# EAGLE board Rover-7_Power_Supply (EAGLE 7.7.0)
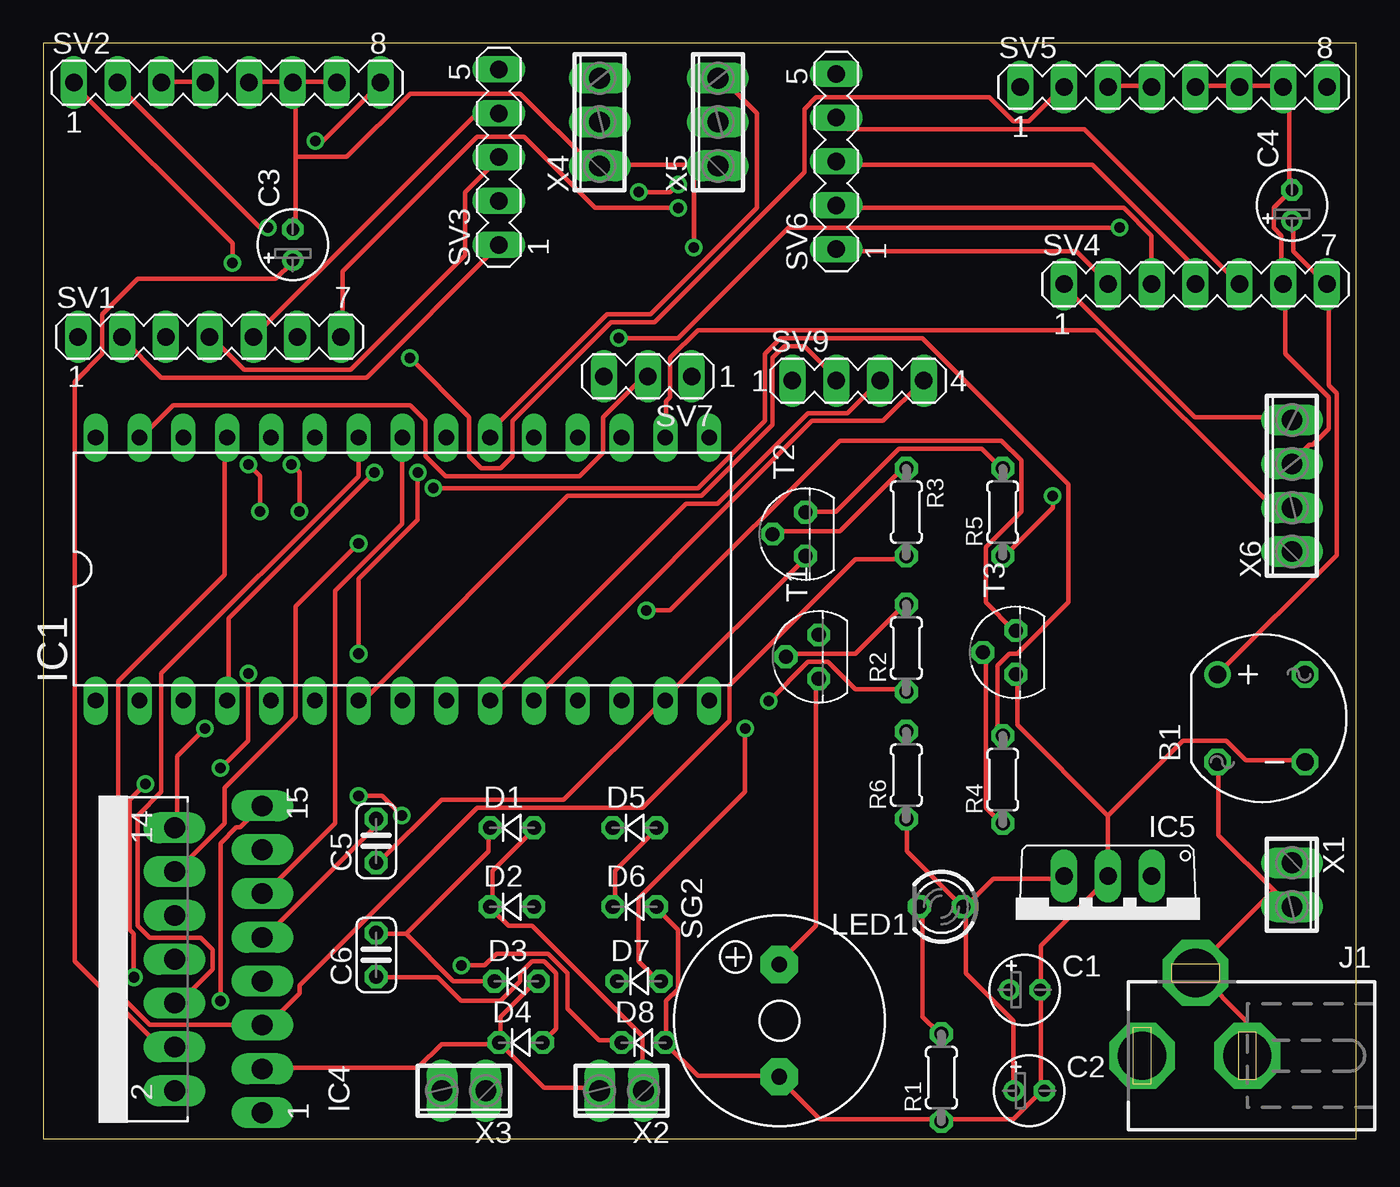
[diagram p0: board, top side]
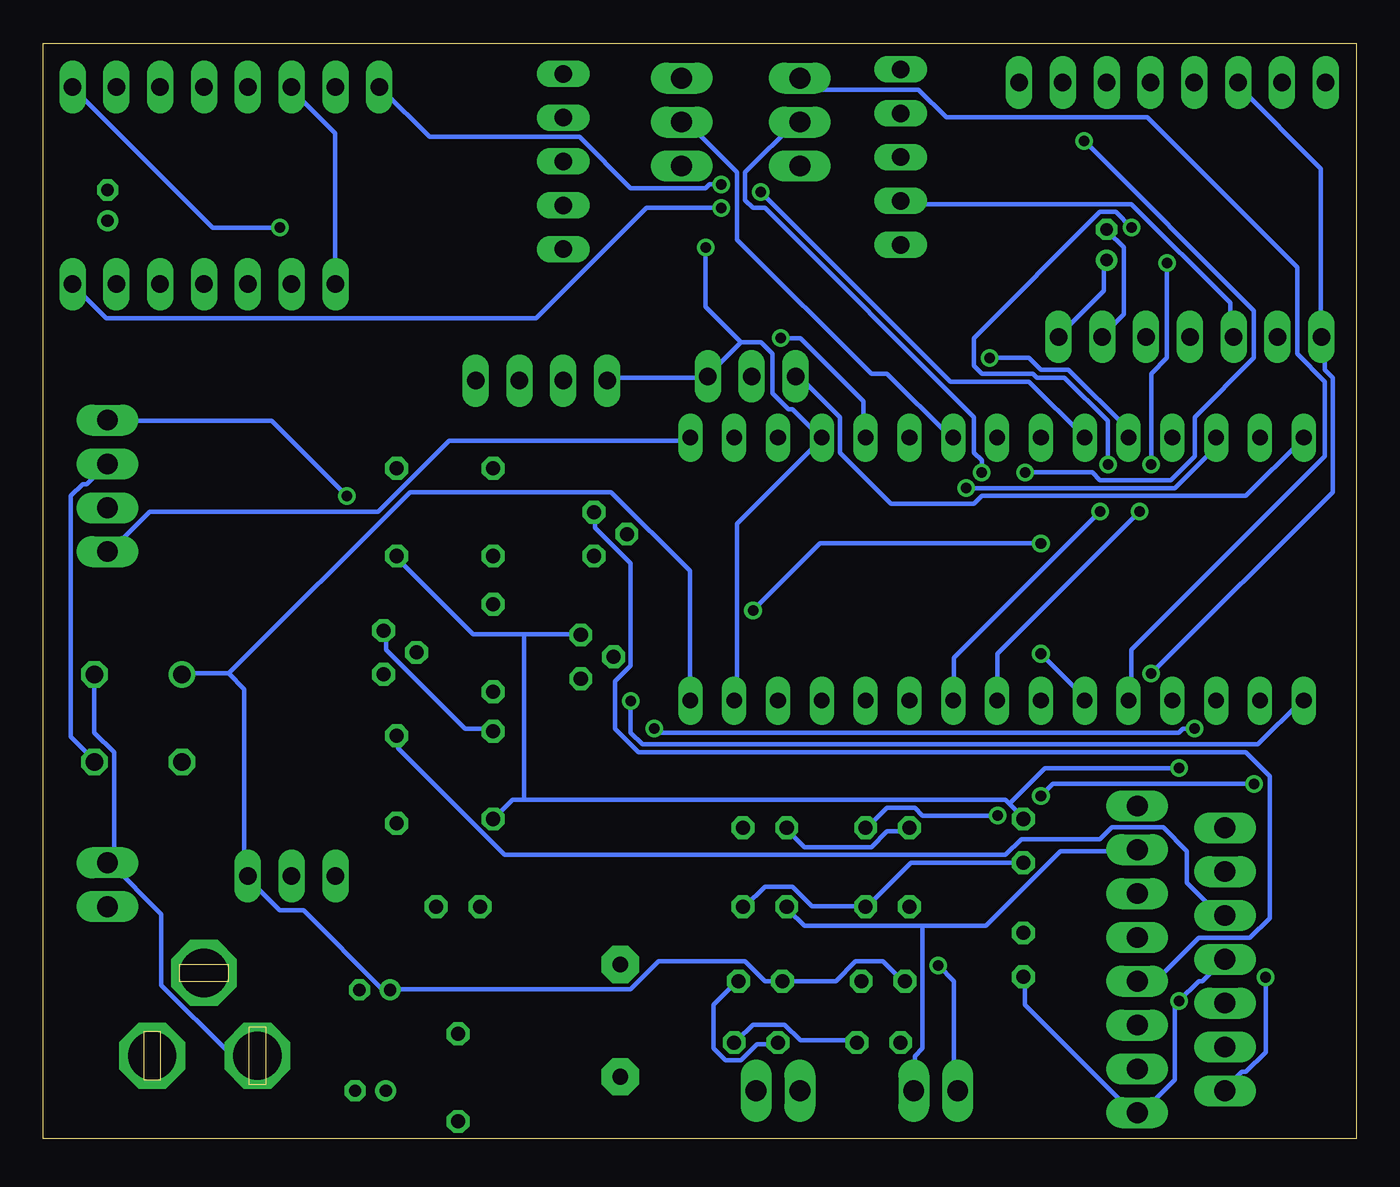
[diagram p1: board, bottom side, seen from below]

Size 76.12 x 63.49 mm. Coordinates in mm from the lower left corner, seen from the top.
Outline: 0,0 76.12,0 76.12,63.49 0,63.49 0,0
Copper layers (1*16): Top 0.035mm / dielectric 1.5mm / Bottom 0.035mm
Design rules "default": minimum track width 10mil, minimum drill 24mil, track to track 8mil, track to pad 8mil, pad to pad 8mil, via to via 8mil, smd to smd 8mil, copper to edge 40mil, drill to drill 8mil, minimum pad ring 10mil, minimum via ring 8mil, stop-mask expansion 4mil, vias tented up to drill 0mil, thermal gap 10mil

## Footprints (pad centres in the part's own frame; a part is rotated, then mirrored left to right if it is on the bottom)
RB1A = drill 1.016: + -2.54,2.54 | drill 1.016 octagon: - 2.54,-2.54; AC1 2.54,2.54; AC2 -2.54,-2.54
E1,8-4 = drill 0.711 pad 1.168: + -0.889,0 | drill 0.711 pad 1.168 octagon: - 0.889,0
C025-024X044 = drill 0.813 octagon: 1 -1.27,0; 2 1.27,0
D-2.5 = drill 0.813 octagon: A 1.27,0; C -1.27,0
DIL32 = drill 0.9 long: 1 -19.05,-7.62; 2 -16.51,-7.62; 3 -13.97,-7.62; 4 -11.43,-7.62; 5 -8.89,-7.62; 6 -6.35,-7.62; 7 -3.81,-7.62; 8 -1.27,-7.62; 9 1.27,-7.62; 10 3.81,-7.62; 11 6.35,-7.62; 12 8.89,-7.62; 13 11.43,-7.62; 14 13.97,-7.62; 15 16.51,-7.62; 18 16.51,7.62; 19 13.97,7.62; 20 11.43,7.62; 21 8.89,7.62; 22 6.35,7.62; 23 3.81,7.62; 24 1.27,7.62; 25 -1.27,7.62; 26 -3.81,7.62; 27 -6.35,7.62; 28 -8.89,7.62; 29 -11.43,7.62; 30 -13.97,7.62; 31 -16.51,7.62; 32 -19.05,7.62
MULTIWATT-15 = drill 1.2 long: 1 -8.89,-7.62; 2 -7.62,-2.54; 3 -6.35,-7.62; 4 -5.08,-2.54; 5 -3.81,-7.62; 6 -2.54,-2.54; 7 -1.27,-7.62; 8 0,-2.54; 9 1.27,-7.62; 10 2.54,-2.54; 11 3.81,-7.62; 12 5.08,-2.54; 13 6.35,-7.62; 14 7.62,-2.54; 15 8.89,-7.62
TO220V = drill 1.016 long: 1 -2.54,-2.54; 2 0,-2.54; 3 2.54,-2.54
ROVER-PW-JACL = drill 2.8 pad 3.81 octagon: 1 0,3.1; 2 4.8,0; 3 0,-3
LED3MM = drill 0.813 octagon: A -1.27,0; K 1.27,0
0204/5 = drill 0.813 octagon: 1 -2.54,0; 2 2.54,0
F/QMX = drill 0.914 pad 2.159 octagon: + 3.251,0; - -3.251,0
MA07-1 = drill 1.016 long: 1 -7.62,0; 2 -5.08,0; 3 -2.54,0; 4 0,0; 5 2.54,0; 6 5.08,0; 7 7.62,0
MA08-1 = drill 1.016 long: 1 -8.89,0; 2 -6.35,0; 3 -3.81,0; 4 -1.27,0; 5 1.27,0; 6 3.81,0; 7 6.35,0; 8 8.89,0
MA05-1 = drill 1.016 long: 1 -5.08,0; 2 -2.54,0; 3 0,0; 4 2.54,0; 5 5.08,0
MA03-1 = drill 1.016 long: 1 -2.54,0; 2 0,0; 3 2.54,0
MA04-1 = drill 1.016 long: 1 -3.81,0; 2 -1.27,0; 3 1.27,0; 4 3.81,0
TO92 = drill 0.813 octagon: 1 1.27,0; 2 0,1.905; 3 -1.27,0
2POL254 = drill 1.2 long: 1 -1.27,0; 2 1.27,0
3POL254 = drill 1.2 long: 1 -2.54,0; 2 0,0; 3 2.54,0
4POL254 = drill 1.2 long: 1 -3.81,0; 2 -1.27,0; 3 1.27,0; 4 3.81,0

## Placement (x,y rotation side)
B1  RECTIFIER  [RB1A]  70.61,24.38 0 top
C1  100uF  [E1,8-4]  56.9,8.64 0 top
C2  100uF  [E1,8-4]  57.15,2.79 0 top
C3  100uF  [E1,8-4]  14.48,51.82 90 top
C4  100uF  [E1,8-4]  72.39,54.1 90 top
C5  0.1uF  [C025-024X044]  19.3,17.27 90 top
C6  0.1uF  [C025-024X044]  19.3,10.67 90 top
D1  [D-2.5]  27.18,18.03 0 top
D2  [D-2.5]  27.18,13.46 0 top
D3  [D-2.5]  27.43,9.14 0 top
D4  [D-2.5]  27.69,5.59 0 top
D5  [D-2.5]  34.29,18.03 0 top
D6  [D-2.5]  34.29,13.46 0 top
D7  [D-2.5]  34.54,9.14 0 top
D8  [D-2.5]  34.8,5.59 0 top
IC1  Nano Module  [DIL32]  22.1,33.02 0 top
IC4  L298_DC_Motor_Driver  [MULTIWATT-15]  5.08,10.41 90 top
IC5  7805TV  [TO220V]  61.72,12.7 180 top
J1  Power Jack  [ROVER-PW-JACL]  66.8,4.83 90 top
LED1  [LED3MM]  52.07,13.46 180 top
R1  680  [0204/5]  52.07,3.56 90 top
R2  1K  [0204/5]  50.04,28.45 90 top
R3  1K  [0204/5]  50.04,36.32 270 top
R4  1K  [0204/5]  55.63,20.83 90 top
R5  10K  [0204/5]  55.63,36.32 90 top
R6  10K  [0204/5]  50.04,21.08 90 top
SG2  Buzzer  [F/QMX]  42.67,6.86 90 top
SV1  STEP1_DR_MOD_2  [MA07-1]  9.65,46.48 0 top
SV2  STEP1_DR_MOD_1  [MA08-1]  10.67,61.21 0 top
SV3  STEP1_CON  [MA05-1]  26.42,56.9 90 top
SV4  STEP2_DR_MOD_2  [MA07-1]  66.8,49.53 0 top
SV5  STEP2_DR_MOD_1  [MA08-1]  65.53,60.96 0 top
SV6  STEP2_CON  [MA05-1]  45.97,56.64 90 top
SV7  SPI_CON  [MA03-1]  35.05,44.2 180 top
SV9  SPARE_IO  [MA04-1]  47.24,43.94 0 top
T1  2N3904  [TO92]  44.96,27.94 90 top
T2  2N3904  [TO92]  44.2,35.05 90 top
T3  2N3904  [TO92]  56.39,28.19 90 top
X1  Power Con  [2POL254]  72.39,14.73 270 top
X2  [2POL254]  33.53,2.79 180 top
X3  [2POL254]  24.38,2.79 180 top
X4  STEP1_SENS_CON  [3POL254]  32.26,58.93 90 top
X5  STEP2_SENS_CON  [3POL254]  39.12,58.93 90 top
X6  Bluetooth Con  [4POL254]  72.39,37.85 90 top

## Library data of the parts
B1 = rectifier
C1-C4 R1-R6 = rcl
C5 C6 = resistor
D1-D8 = diode
IC1 = Nano-II_DIP_30P
IC4 = st-microelectronics; MPN: L298N; OC_FARNELL: 1589425; OC_NEWARK: 32M1527
IC5 = linear
J1 = Rover-PW-Jack; OC_FARNELL: unknown; OC_NEWARK: unknown
LED1 = led
SG2 = buzzer; OC_FARNELL: unknown; OC_NEWARK: unknown
SV1-SV7 SV9 = con-lstb; OC_FARNELL: unknown; OC_NEWARK: unknown
T1-T3 = transistor
X1-X6 = con-phoenix-254; OC_FARNELL: unknown; OC_NEWARK: unknown

## Nets
+5V: C2.+ C5.2 IC4.9 IC5.3 LED1.A R5.1 R6.1 SV1.1 SV2.3 SV2.4 SV4.1 SV5.3 SV5.4 T1.1 X6.4
+12V: B1.+ C1.+ C3.+ C4.+ C6.2 D1.C D3.C D5.C D7.C IC1.15 IC4.4 IC5.1 SV1.7 SV4.7
A3: IC1.7 SV9.2
A6: IC1.10 SV9.3
A7: IC1.11 SV9.4
BUZ_D13: IC1.1 R2.1
M1_A: D1.A D2.C IC4.2 X2.1
M1_B: D3.A D4.C IC4.3 X2.2
M1_DIR_D9: IC1.29 IC4.5 R3.2
M1_DIR_D9_INV: IC4.7 R5.2 T2.1
M1_PWM_D6: IC1.26 IC4.6
M2_A: D5.A D6.C IC4.13 X3.1
M2_B: D7.A D8.C IC4.14 X3.2
M2_DIR_D10: IC1.30 IC4.10 R4.2
M2_DIR_D10_INV: IC4.12 R6.2 T3.1
M2_PWM_D5: IC1.25 IC4.11
MISO_D12: IC1.32 SV7.3
MOSI_D11: IC1.31 SV7.2
N$2: B1.AC1 J1.1 X1.1
N$3: B1.AC2 J1.2 J1.3 X1.2
N$4: LED1.K R1.2
N$5: R4.1 T3.2
N$6: R3.1 T2.2
N$8: SG2.+ T1.3
N$9: R2.2 T1.2
PE: B1.- C1.- C2.- C3.- C4.- C5.1 C6.1 D2.A D4.A D6.A D8.A IC1.14 IC1.21 IC4.1 IC4.8 IC4.15 IC5.2 R1.1 SG2.- SV1.6 SV2.5 SV2.6 SV2.7 SV4.6 SV5.5 SV5.6 SV5.7 SV7.1 SV9.1 T2.3 T3.3 X4.1 X5.1 X6.3
RX_D1: IC1.19 X6.2
STEP1_1A: SV1.3 SV3.2
STEP1_1B: SV1.2 SV3.1
STEP1_2A: SV1.4 SV3.3
STEP1_2B: SV1.5 SV3.4
STEP1_DIR_A4: IC1.8 SV2.1
STEP1_EN_A0: IC1.4 SV2.8
STEP1_L_SW_A1: IC1.5 X4.3
STEP1_R_SW_A2: IC1.6 X4.2
STEP1_STEP_A5: IC1.9 SV2.2
STEP2_1A: SV4.3 SV6.2
STEP2_1B: SV4.2 SV6.1
STEP2_2A: SV4.4 SV6.3
STEP2_2B: SV4.5 SV6.4
STEP2_DIR_D7: IC1.27 SV5.1
STEP2_EN_D2: IC1.22 SV5.8
STEP2_L_SW_D4: IC1.24 X5.2
STEP2_R_SW_D3: IC1.23 X5.3
STEP2_STEP_D8: IC1.28 SV5.2
TX_D0: IC1.18 X6.1

## Tracks (layer width: path | path; a pad name or v marks a point on that pad's centre or on a via)
+5V  (via drill 0.61)
  Top 0.254: SV5.4 64.24,61.04 61.72,61.04 SV5.3 | X6.4 72.24,41.83 66.75,41.83 59.21,49.38 SV4.1 | SV2.4 9.37,61.27 6.86,61.27 SV2.3 | C5.2 19.2,18.52 19.2,18.06 12.8,11.66 IC4.9 | C2.+ 56.24,2.97 56.24,6.86 53.49,9.6 53.49,13.26 LED1.A | R6.1 50.06,18.52 50.06,16.69 53.26,13.49 LED1.A | IC5.3 58.98,15.09 55.09,15.09 53.49,13.49 LED1.A | v11.89,26.98 11.89,23.09 v10.29,21.49 | v58.52,37.26 58.52,36.58 55.78,33.83 R5.1
  Bottom 0.254: SV4.1 59.21,49.61 59.21,58.29 61.72,60.81 SV5.3 | SV2.3 6.86,61.04 2.06,56.24 2.06,46.63 SV1.1 1.83,46.41 1.83,44.58 1.37,44.12 1.37,37.49 v11.89,26.98 | 48.23,29.26 51.21,29.26 55.55,33.6 R5.1 | 48.23,29.26 45.03,29.26 T1.1 | 20.12,19.43 20.34,19.66 48.23,19.66 | 20.12,19.43 19.43,18.75 C5.2 | 48.23,19.66 48.92,19.66 R6.1 | 48.23,19.66 48.23,29.26 | v10.29,21.49 18.06,21.49 20.12,19.43 | v58.52,37.26 62.87,41.6 72.24,41.6 X6.4
+12V  (via drill 0.61)
  Top 0.254: IC4.4 7.54,5.49 6.63,5.49 1.83,10.29 1.83,43.89 3.43,45.49 3.43,47.78 5.49,49.84 13.49,49.84 14.4,50.75 C3.+ | 21.03,11.89 19.43,11.89 C6.2 | 21.03,11.89 23.77,9.14 D3.C | 21.03,11.89 25.83,16.69 25.83,17.83 D1.C | C4.+ 72.47,53.03 72.47,51.44 74.3,49.61 SV4.7 74.52,49.38 74.52,43.66 74.98,43.2 74.98,33.83 B1.+ | v36.8,53.95 32,53.95 27.89,58.06 25.15,58.06 17.37,50.29 17.37,46.63 SV1.7
  Bottom 0.254: C3.+ 14.63,50.75 14.63,49.15 17.14,46.63 SV1.7 | D1.C 26.06,17.83 27.2,17.83 28.12,16.92 32,16.92 32.92,17.83 D5.C | D3.C 26.29,9.14 27.43,10.29 29.03,10.29 30.18,9.14 D7.C 34.29,9.14 35.43,10.29 40.46,10.29 42.06,8.69 56.01,8.69 | 56.01,8.69 56.46,8.69 61.04,13.26 62.41,13.26 64.24,15.09 IC5.1 64.47,15.32 64.47,26.06 65.38,26.98 | 65.38,26.98 54.86,37.49 43.2,37.49 38.63,32.92 38.63,25.6 IC1.15 | 65.38,26.98 67.89,26.98 B1.+ | 56.01,8.69 C1.+ | v36.8,53.95 41.15,53.95 47.55,47.55 72.47,47.55 74.3,49.38 SV4.7
A3
  Top 0.254: IC1.7 18.29,25.6 18.75,25.6 30.4,37.26 38.18,37.26 42.29,41.38 42.29,45.26 42.98,45.95 44.12,45.95 45.95,44.12 SV9.2
A6
  Top 0.254: SV9.3 46.63,42.06 44.35,42.06 39.09,36.8 37.26,36.8 26.06,25.6 IC1.10
A7
  Top 0.254: IC1.11 28.57,25.6 44.58,41.6 48.69,41.6 50.98,43.89 SV9.4
BUZ_D13  (via drill 0.61)
  Top 0.254: v42.06,25.38 44.35,27.66 45.49,27.66 47.09,26.06 49.84,26.06 R2.1
  Bottom 0.254: v42.06,25.38 42.06,23.55 41.38,22.86 5.71,22.86 3.2,25.38 IC1.1
M1_A  (via drill 0.61)
  Top 0.254: D1.A 28.35,17.83 26.06,15.54 26.06,13.49 D2.C 26.06,13.26 26.98,12.34 28.35,12.34 34.75,5.94 34.75,2.97 X2.1 | v5.26,9.37 5.26,11.89 5.03,12.12 5.03,19.66 v5.94,20.57 | v18.29,19.89 19.66,19.89 v20.8,18.75
  Bottom 0.254: v5.26,9.37 5.26,5.03 6.4,3.89 6.63,3.89 7.54,2.97 IC4.2 | v5.94,20.57 17.6,20.57 v18.29,19.89 | v20.8,18.75 25.15,18.75 25.6,19.2 27.2,19.2 28.35,18.06 D1.A
M1_B
  Top 0.254: D4.C 26.52,5.71 26.52,7.09 28.57,9.14 D3.A | D4.C 29.03,2.97 32.23,2.97 X2.2 | IC4.3 12.8,4.12 21.72,4.12 23.09,5.49 26.29,5.49 D4.C
M1_DIR_D9
  Top 0.254: R3.2 49.84,33.6 47.09,33.6 39.78,26.29 39.78,24.23 34.75,19.2 25.15,19.2 14.86,8.91 14.86,8.46 12.8,6.4 IC4.5 12.57,6.63 6.17,6.63 4.34,8.46 4.34,26.52 10.52,32.69 10.52,40.46 IC1.29
M1_DIR_D9_INV
  Top 0.254: T2.1 44.35,36.35 45.95,36.35 49.61,40.01 54.41,40.01 55.55,38.86 R5.2
  Bottom 0.254: IC4.7 11.66,9.14 9.14,11.66 6.17,11.66 5.03,12.8 5.03,21.03 6.4,22.4 41.6,22.4 42.98,23.77 42.98,26.52 42.06,27.43 42.06,33.38 44.12,35.43 44.12,36.12 T2.1
M1_PWM_D6
  Top 0.254: IC1.26 18.29,38.41 6.86,26.98 6.86,20.12 5.49,18.75 5.49,12.34 6.17,11.66 9.14,11.66 9.83,10.97 9.83,9.83 7.77,7.77 IC4.6
M2_A
  Top 0.254: D6.C 33.15,13.49 33.15,15.54 35.43,17.83 D5.A
  Bottom 0.254: 25.15,12.34 32,12.34 32.92,13.26 D6.C | 25.15,12.34 21.49,12.34 17.14,16.69 12.8,16.69 IC4.13 | 25.15,12.34 25.15,5.26 25.6,4.8 25.6,2.97 X3.1
M2_B  (via drill 0.61)
  Top 0.254: v24.23,10.06 25.6,10.06 26.29,10.74 29.26,10.74 30.4,9.6 30.4,7.54 32.23,5.71 33.38,5.71 D8.C | v9.37,23.77 7.77,22.17 7.77,18.06 IC4.14 | v40.69,23.77 40.69,20.12 34.52,13.95 34.52,10.29 35.66,9.14 D7.A
  Bottom 0.254: D8.C 33.6,5.49 34.75,5.49 35.66,4.57 36.58,4.57 37.26,5.26 37.26,7.77 35.89,9.14 D7.A | v24.23,10.06 23.32,9.14 23.32,2.97 X3.2 | v9.37,23.77 10.06,23.77 10.29,23.55 40.46,23.55 v40.69,23.77
M2_DIR_D10  (via drill 0.61)
  Top 0.254: v22.63,37.72 37.95,37.72 41.83,41.6 41.83,45.49 42.75,46.41 50.98,46.41 59.44,37.95 59.44,31.09 56.46,28.12 56.01,28.12 55.32,27.43 55.32,23.77 55.55,23.55 R4.2
  Bottom 0.254: R4.2 55.55,23.32 55.55,22.63 49.38,16.46 20.34,16.46 19.43,17.37 14.86,17.37 14.17,18.06 11.2,18.06 9.83,16.69 9.83,14.86 7.77,12.8 IC4.10 | v22.63,37.72 10.52,37.72 8.23,40.01 8.23,40.46 IC1.30
M2_DIR_D10_INV  (via drill 0.61)
  Top 0.254: v18.29,34.52 14.63,30.86 14.63,24.46 10.52,20.34 10.52,18.29 7.77,15.54 IC4.12 | v34.98,30.63 36.35,30.63 46.18,40.46 55.55,40.46 56.69,39.32 56.69,36.35 54.63,34.29 54.63,31.09 56.24,29.49 T3.1
  Bottom 0.254: R6.2 50.06,23.77 51.66,23.77 56.24,28.35 56.24,29.26 T3.1 | v18.29,34.52 31.09,34.52 v34.98,30.63
M2_PWM_D5
  Top 0.254: IC1.25 20.8,40.46 20.8,35.66 16.92,31.77 16.92,18.29 12.8,14.17 IC4.11
MISO_D12
  Bottom 0.254: IC1.32 3.2,40.46 6.4,37.26 21.72,37.26 22.17,36.8 26.98,36.8 29.95,39.78 29.95,41.83 32.46,44.35 SV7.3
MOSI_D11
  Top 0.254: IC1.31 5.71,40.69 7.54,42.52 21.26,42.52 22.17,41.6 22.17,39.55 23.32,38.41 31.09,38.41 32.46,39.78 32.46,41.83 34.98,44.35 SV7.2
N$2
  Bottom 0.254: B1.AC1 73.15,23.55 72.01,22.4 72.01,16.23 72.24,16 | 72.24,16 69.27,13.03 69.27,8.91 65.38,5.03 63.78,5.03 J1.1 | 72.24,16 X1.1
N$3
  Top 0.254: 71.32,14.4 72.24,13.49 X1.2 | 71.32,14.4 68.12,17.6 68.12,21.72 B1.AC2 | 71.32,14.4 66.75,9.83 J1.2 66.98,9.6 69.72,6.86 69.72,5.03 J1.3
N$4
  Top 0.254: LED1.K 50.98,13.26 50.98,7.09 51.89,6.17 R1.2
N$5
  Top 0.254: T3.2 54.63,28.12 54.63,19.2 55.55,18.29 R4.1
N$6
  Top 0.254: T2.2 42.29,35.2 46.18,35.2 49.84,38.86 R3.1
N$8
  Top 0.254: T1.3 44.81,26.52 44.81,12.34 42.75,10.29 SG2.+
N$9
  Top 0.254: T1.2 43.2,28.12 47.09,28.12 49.84,30.86 R2.2
PE  (via drill 0.61)
  Top 0.254: SV5.5 66.98,61.04 69.27,61.04 SV5.6 69.49,61.04 71.78,61.04 SV5.7 72.01,60.81 72.24,60.58 72.24,55.09 C4.- 72.24,54.86 71.32,53.95 71.32,52.81 71.78,52.35 71.78,49.61 SV4.6 72.01,49.38 72.01,45.49 74.52,42.98 74.52,41.15 73.61,40.23 73.38,40.23 72.47,39.32 X6.3 | 61.72,18.75 56.46,24 56.46,26.75 T3.3 | 61.72,18.75 IC5.2 61.72,15.09 57.84,11.2 57.84,8.69 C1.- 57.84,8.46 57.84,2.97 C2.- 57.84,2.74 56.24,1.14 52.12,1.14 R1.1 51.89,1.14 45.03,1.14 42.75,3.43 SG2.- 42.52,3.66 37.95,3.66 36.12,5.49 D8.A 36.12,5.71 36.12,8 36.8,8.69 36.8,12.12 35.66,13.26 D6.A | 61.72,18.75 66.06,23.09 68.58,23.09 69.72,21.95 73.15,21.95 B1.- | 37.72,56.46 39.09,56.46 X5.1 37.72,56.46 | 37.72,56.46 32.46,56.46 X4.1 32.23,56.46 31.77,56.46 27.66,60.58 21.26,60.58 17.6,56.92 14.63,56.92 | SV2.5 12.12,61.27 14.4,61.27 SV2.6 | SV2.7 16.92,61.27 14.63,61.27 SV2.6 | 14.63,56.92 14.63,52.81 C3.- | 14.63,56.92 14.63,61.04 SV2.6 | T2.3 44.12,33.6 36.12,25.6 IC1.14 35.89,25.38 30.18,19.66 23.09,19.66 19.43,16 C5.1 | v10.29,8 10.29,17.14 11.2,18.06 11.43,18.06 12.57,19.2 IC4.15 | C6.1 19.43,9.37 22.86,9.37 24.23,8 26.52,8 27.66,9.14 27.66,9.6 28.35,10.29 29.03,10.29 29.72,9.6 29.72,6.4 29.03,5.71 D4.A | v37.72,51.66 37.72,56.46
  Bottom 0.254: X6.3 72.47,39.09 73.61,37.95 73.84,37.95 74.52,37.26 74.52,23.32 73.15,21.95 B1.- | C3.- 14.4,52.58 13.49,51.66 13.49,47.78 14.63,46.63 SV1.6 | 35.66,46.18 34.52,46.18 33.83,45.49 33.83,43.2 32.92,42.29 32.69,42.29 31.09,40.69 IC1.21 31.09,40.46 35.89,35.66 35.89,25.6 IC1.14 | 35.66,46.18 37.49,44.35 SV7.1 37.72,44.12 43.43,44.12 SV9.1 | C6.1 19.2,9.37 19.2,7.77 12.8,1.37 IC4.1 12.57,1.37 10.52,3.43 10.52,7.77 v10.29,8 9.14,9.14 8.91,9.14 7.77,10.29 IC4.8 | D4.A 29.03,5.71 32.23,5.71 33.15,6.63 34.98,6.63 35.89,5.71 D8.A | D6.A 35.43,13.49 34.29,14.63 32.69,14.63 31.55,13.49 28.57,13.49 D2.A 28.35,13.49 25.83,16 C5.1 | v37.72,51.66 37.72,48.23 35.66,46.18
RX_D1
  Top 0.254: X6.2 71.32,36.58 61.04,46.86 37.95,46.86 36.35,45.26 36.35,42.98 36.12,42.75 36.12,40.69 IC1.19
STEP1_1A
  Bottom 0.254: SV1.3 7.32,46.63 7.32,48.46 13.03,54.18 26.29,54.18 SV3.2
STEP1_1B
  Top 0.254: SV1.2 4.57,46.41 6.86,44.12 18.75,44.12 26.29,51.66 SV3.1
STEP1_2A
  Top 0.254: SV1.4 9.83,46.41 11.66,44.58 17.83,44.58 24.46,51.21 24.46,54.86 26.29,56.69 SV3.3
STEP1_2B
  Top 0.254: SV1.5 25.15,59.44 SV3.4
STEP1_DIR_A4  (via drill 0.61)
  Top 0.254: v12.57,36.35 12.57,38.41 v11.89,39.09 | v10.97,50.75 10.97,51.89 1.83,61.04 SV2.1
  Bottom 0.254: v12.57,36.35 20.8,28.12 20.8,25.6 IC1.8 | v11.89,39.09 11.89,44.35 10.97,45.26 v10.97,50.75
STEP1_EN_A0  (via drill 0.61)
  Top 0.254: v19.2,38.63 10.74,30.18 10.74,25.6 IC1.4 | v15.77,57.84 16.23,57.84 19.43,61.04 SV2.8
  Bottom 0.254: v19.2,38.63 15.32,38.63 14.86,38.18 10.74,38.18 9.37,39.55 9.37,41.83 5.94,45.26 5.94,48.01 v15.77,57.84
STEP1_L_SW_A1
  Bottom 0.254: IC1.5 13.03,25.6 13.03,28.35 1.83,39.55 1.83,43.89 3.43,45.49 3.43,50.52 12.12,59.21 23.77,59.21 25.38,60.81 31.77,60.81 32.23,61.27 X4.3
STEP1_R_SW_A2  (via drill 0.61)
  Top 0.254: v18.29,28.12 18.29,32.46 21.72,35.89 v21.72,38.63
  Bottom 0.254: v18.29,28.12 15.77,25.6 IC1.6 | v21.72,38.63 21.72,39.32 22.17,39.78 22.17,41.83 34.29,53.95 34.98,53.95 35.43,54.41 35.43,56.01 32.46,58.98 X4.2
STEP1_STEP_A5  (via drill 0.61)
  Top 0.254: v14.86,36.35 14.86,38.63 v14.4,39.09 | v13.03,52.81 12.57,52.81 4.34,61.04 SV2.2
  Bottom 0.254: v14.86,36.35 23.32,27.89 23.32,25.6 IC1.9 | v14.4,39.09 14.4,41.6 16.92,44.12 18.52,44.12 18.75,44.35 21.72,44.35 22.17,44.81 22.17,46.41 14.86,53.72 13.95,53.72 v13.03,52.81
STEP2_1A
  Top 0.254: SV4.3 64.24,49.61 64.24,52.35 62.64,53.95 46.18,53.95 SV6.2
STEP2_1B
  Top 0.254: SV4.2 61.72,49.61 59.89,51.44 46.18,51.44 SV6.1
STEP2_2A
  Top 0.254: SV4.4 66.75,49.61 66.75,50.52 60.81,56.46 46.18,56.46 SV6.3
STEP2_2B
  Top 0.254: SV4.5 60.35,58.52 46.63,58.52 SV6.4
STEP2_DIR_D7  (via drill 0.61)
  Top 0.254: v34.52,54.86 36.35,54.86 v36.8,55.32
  Bottom 0.254: v34.52,54.86 23.55,43.89 18.97,43.89 15.77,40.69 IC1.27 | v36.8,55.32 37.49,55.32 37.72,55.09 42.06,55.09 45.03,58.06 53.72,58.06 56.46,60.81 SV5.1
STEP2_EN_D2  (via drill 0.61)
  Top 0.254: v33.38,46.41 36.8,46.41 43.2,52.81 v62.41,52.81
  Bottom 0.254: v33.38,46.41 32.23,46.41 28.57,42.75 28.57,40.69 IC1.22 | v62.41,52.81 66.29,52.81 74.3,60.81 SV5.8
STEP2_L_SW_D4
  Bottom 0.254: IC1.24 23.55,40.69 27.2,44.35 28.12,44.35 35.89,52.12 35.89,56.01 38.63,58.75 39.09,58.75 X5.2
STEP2_R_SW_D3
  Top 0.254: IC1.23 26.06,40.69 26.06,41.15 32.69,47.78 35.2,47.78 41.38,53.95 41.38,59.44 39.32,61.49 X5.3
STEP2_STEP_D8  (via drill 0.61)
  Top 0.254: v21.26,45.26 24.69,41.83 24.69,39.55 25.38,38.86 26.52,38.86 27.2,39.55 27.2,41.6 32.92,47.32 35.43,47.32 44.12,56.01 44.12,59.66 44.81,60.35 54.86,60.35 56.24,58.98 57.15,58.98 58.98,60.81 SV5.2
  Bottom 0.254: v21.26,45.26 18.97,45.26 18.29,44.58 16.69,44.58 13.26,41.15 13.26,40.69 IC1.28
TX_D0
  Bottom 0.254: IC1.18 38.63,40.46 52.58,40.46 56.69,36.35 69.95,36.35 72.24,34.06 X6.1